# EAGLE board main-board_stm32 (EAGLE 9.6.2)

Size 171.07 x 156.59 mm. Coordinates in mm from the lower left corner, seen from the top.
Outline: 133.18,156.59 128.95,156.59 128.95,149.93 121.08,149.93 121.08,156.59 50.64,156.59 50.64,150.03 42.52,150.03 42.52,156.59 37.88,156.59 arc113 39.33,13.59 42.51,19.04 49.33,15.07 46.33,9.49 arc55 125.13,9.59 124.69,10.3 121.79,15.26 128.61,19.1 131.95,13.69 arc113 133.18,156.59
Copper layers (1*16): Top 0.035mm / dielectric 1.5mm / Bottom 0.035mm
Design rules "default": minimum track width 6mil, minimum drill 0.35mm, track to track 6mil, track to pad 6mil, pad to pad 6mil, via to via 6mil, smd to smd 6mil, copper to edge 40mil, drill to drill 6mil, minimum pad ring 10mil, minimum via ring 8mil, stop-mask expansion 4mil, vias tented up to drill 0mil, thermal gap 10mil
Net classes: 0 default: width 0.3 mm, drill 0.4 mm, clearance 0.2 mm; 4 gnd: width 0.3 mm, drill 0.4 mm, clearance 0.2 mm; 5 VCKT: width 4 mm, drill 4 mm, clearance 0.2 mm
Holes 3.2 mm at 13.66,42.92 65.2,5.12 105.87,5.12 157.41,42.92 29.64,145.78 13.66,125.92 141.42,145.78 157.41,125.92

## Footprints (pad centres in the part's own frame; a part is rotated, then mirrored left to right if it is on the bottom)
CHIPLED_1206 = smd 1.5 x 1.5: A 0,-1.75; C 0,1.75
C1206 = smd 1.6 x 1.8: 1 -1.4,0; 2 1.4,0
TO252 = smd 1 x 1.6: 1 -2.28,-4.8; 2 2.28,-4.8 | smd 5.4 x 6.2: 3 0,2.5
SOT230P700X180-4N = smd 1.75 x 0.9: 1 -3.05,2.3; 2 -3.05,0; 3 -3.05,-2.3 | smd 1.75 x 3.2: 4 3.05,0
SOP65P640X120-16N = smd 1.475 x 0.45: 1 -2.938,2.275; 2 -2.938,1.625; 3 -2.938,0.975; 4 -2.938,0.325; 5 -2.938,-0.325; 6 -2.938,-0.975; 7 -2.938,-1.625; 8 -2.938,-2.275; 9 2.938,-2.275; 10 2.938,-1.625; 11 2.938,-0.975; 12 2.938,-0.325; 13 2.938,0.325; 14 2.938,0.975; 15 2.938,1.625; 16 2.938,2.275
2X5-SHROUDED_LOCK = drill 1.016 pad 1.88: 1 -1.397,5.08; 2 1.397,5.08; 3 -1.397,2.54; 4 1.397,2.54; 5 -1.397,0; 6 1.397,0; 7 -1.397,-2.54; 8 1.397,-2.54; 9 -1.397,-5.08; 10 1.397,-5.08
43045-0613 = drill 1.07 pad 1.62: 1 3,0; 2 0,0; 3 -3,0; 4 3,3; 5 0,3; 6 -3,3; 7 -6,3.94; 8 6,3.94
AMASS_XT60-M = drill 4.5 square: 1 -3.6,0 | drill 4.5: 2 3.6,0
1X03 = drill 1.016 long: 1 -2.54,0; 2 0,0; 3 2.54,0
1X06 = drill 1.016 long: 1 -6.35,0; 2 -3.81,0; 3 -1.27,0; 4 1.27,0; 5 3.81,0; 6 6.35,0
WIRELESS-NRD24L01-PA-EXT = drill 1 square: 1 -18.415,3.81 | drill 1: 2 -15.875,3.81; 3 -18.415,1.27; 4 -15.875,1.27; 5 -18.415,-1.27; 6 -15.875,-1.27; 7 -18.415,-3.81; 8 -15.875,-3.81
KRSSG_MOTOR_DRIVER = drill 1 long: 5V 13.652,5.334; 18V -13.525,13.97; 18V_2 -13.525,11.43; GND -13.525,-6.35; GND_2 -13.525,-8.89; IN17 13.652,-5.334; IN18 13.652,-7.874; M1 13.652,14.478; M1_2 13.652,11.938; M1A -13.525,8.89; M1B -13.525,6.35; M2 13.652,1.27; M2_2 13.652,-1.27; M2A -13.525,3.81; M2B -13.525,1.27; M3 13.652,-11.938; M3_2 13.652,-14.478; M3A -13.525,-1.27; M3B -13.525,-3.81; MACS_OUT 13.652,7.874
M1206 = smd 1.6 x 2: 1 -1.4,0; 2 1.4,0
DTS-6 = drill 1 long: 1 -3.25,2.25; 2 3.25,2.25; 3 -3.25,-2.25; 4 3.25,-2.25
1X08 = drill 1.016 long: 1 -8.89,0; 2 -6.35,0; 3 -3.81,0; 4 -1.27,0; 5 1.27,0; 6 3.81,0; 7 6.35,0; 8 8.89,0
LQFP100-14X14MM = smd 1.194 x 0.305: 1 -7.75,6; 2 -7.75,5.5; 3 -7.75,5; 4 -7.75,4.5; 5 -7.75,4; 6 -7.75,3.5; 7 -7.75,3; 8 -7.75,2.5; 9 -7.75,2; 10 -7.75,1.5; 11 -7.75,1; 12 -7.75,0.5; 13 -7.75,0; 14 -7.75,-0.5; 15 -7.75,-1; 16 -7.75,-1.5; 17 -7.75,-2; 18 -7.75,-2.5; 19 -7.75,-3; 20 -7.75,-3.5; 21 -7.75,-4; 22 -7.75,-4.5; 23 -7.75,-5; 24 -7.75,-5.5; 25 -7.75,-6; 51 7.75,-6; 52 7.75,-5.5; 53 7.75,-5; 54 7.75,-4.5; 55 7.75,-4; 56 7.75,-3.5; 57 7.75,-3; 58 7.75,-2.5; 59 7.75,-2; 60 7.75,-1.5; 61 7.75,-1; 62 7.75,-0.5; 63 7.75,0; 64 7.75,0.5; 65 7.75,1; 66 7.75,1.5; 67 7.75,2; 68 7.75,2.5; 69 7.75,3; 70 7.75,3.5; 71 7.75,4; 72 7.75,4.5; 73 7.75,5; 74 7.75,5.5; 75 7.75,6 | smd 0.305 x 1.194: 26 -6,-7.75; 27 -5.5,-7.75; 28 -5,-7.75; 29 -4.5,-7.75; 30 -4,-7.75; 31 -3.5,-7.75; 32 -3,-7.75; 33 -2.5,-7.75; 34 -2,-7.75; 35 -1.5,-7.75; 36 -1,-7.75; 37 -0.5,-7.75; 38 0,-7.75; 39 0.5,-7.75; 40 1,-7.75; 41 1.5,-7.75; 42 2,-7.75; 43 2.5,-7.75; 44 3,-7.75; 45 3.5,-7.75; 46 4,-7.75; 47 4.5,-7.75; 48 5,-7.75; 49 5.5,-7.75; 50 6,-7.75; 76 6,7.75; 77 5.5,7.75; 78 5,7.75; 79 4.5,7.75; 80 4,7.75; 81 3.5,7.75; 82 3,7.75; 83 2.5,7.75; 84 2,7.75; 85 1.5,7.75; 86 1,7.75; 87 0.5,7.75; 88 0,7.75; 89 -0.5,7.75; 90 -1,7.75; 91 -1.5,7.75; 92 -2,7.75; 93 -2.5,7.75; 94 -3,7.75; 95 -3.5,7.75; 96 -4,7.75; 97 -4.5,7.75; 98 -5,7.75; 99 -5.5,7.75; 100 -6,7.75
5566-4 = drill 1.4 square: 1 2.1,-2.75; 2 -2.1,-2.75; 3 2.1,2.75; 4 -2.1,2.75 | hole 3: 6.8,2.29; -6.8,2.29

## Placement (x,y rotation side)
3V3_LD  [CHIPLED_1206]  -31.31,-150.63 0 top  (outside the outline)
5V_LD  [CHIPLED_1206]  -27.5,-115.07 0 top  (outside the outline)
C1  0.1uF  [C1206]  2.98,-35.06 0 top  (outside the outline)
C2  0.1uF  [C1206]  2.98,-40.14 0 top  (outside the outline)
C3  0.1uF  [C1206]  2.98,-45.22 0 top  (outside the outline)
C4  0.1uF  [C1206]  2.98,-50.3 0 top  (outside the outline)
C5  0.1uF  [C1206]  2.98,-55.38 0 top  (outside the outline)
C6  0.1uF  [C1206]  2.98,-60.46 0 top  (outside the outline)
C7  4.7uF  [C1206]  2.98,-66.81 0 top  (outside the outline)
C8  4.7uF  [C1206]  2.98,-73.16 0 top  (outside the outline)
C9  0.1uF  [C1206]  2.98,-79.51 0 top  (outside the outline)
C10  0.1uF  [C1206]  -7.18,-85.86 0 top  (outside the outline)
C11  0.1uF  [C1206]  -19.88,-98.56 0 top  (outside the outline)
C12  0.1uF  [C1206]  -19.88,-104.91 0 top  (outside the outline)
C13  4.7uF  [C1206]  -31.31,-130.31 0 top  (outside the outline)
C14  4.7uF  [C1206]  -31.31,-136.66 0 top  (outside the outline)
C15  0.1uF  [C1206]  -31.31,-143.01 0 top  (outside the outline)
C16  4.7uF  [C1206]  -80.84,-88.4 0 top  (outside the outline)
IC1  7805DT  [TO252]  -17.34,-88.4 0 top  (outside the outline)
IC2  AP7365-33ERG-13  [SOT230P700X180-4N]  -26.23,-122.69 0 top  (outside the outline)
IC3  AM26LS32ACPWR  [SOP65P640X120-16N]  -75.76,5.58 0 top  (outside the outline)
IC4  AM26LS32ACPWR  [SOP65P640X120-16N]  -75.76,-0.77 0 top  (outside the outline)
J1  [2X5-SHROUDED_LOCK]  -74.49,168.14 0 top  (outside the outline)
J2  43045-0613  [43045-0613]  -71.95,128.77 0 top  (outside the outline)
J3  [2X5-SHROUDED_LOCK]  -74.49,145.28 0 top  (outside the outline)
J4  43045-0613  [43045-0613]  -71.95,79.24 0 top  (outside the outline)
J5  [2X5-SHROUDED_LOCK]  -74.49,95.75 0 top  (outside the outline)
J6  43045-0613  [43045-0613]  -71.95,183.38 0 top  (outside the outline)
J7  43045-0613  [43045-0613]  -71.95,29.71 0 top  (outside the outline)
J8  [2X5-SHROUDED_LOCK]  -74.49,46.22 0 top  (outside the outline)
J10  XT60-M  [AMASS_XT60-M]  -74.49,-56.65 0 top  (outside the outline)
JP1  [1X03]  -30.04,-164.6 0 top  (outside the outline)
JP2  [1X06]  -26.23,-170.95 0 top  (outside the outline)
M1  WIRELESS-NRF24L01-PA-EXT  [WIRELESS-NRD24L01-PA-EXT]  85.53,135.12 90 top
MD1  KRSSG_MOTOR_DRIVER  [KRSSG_MOTOR_DRIVER]  47.43,110.99 90 top
MD2  KRSSG_MOTOR_DRIVER  [KRSSG_MOTOR_DRIVER]  123.63,110.99 90 top
MD3  KRSSG_MOTOR_DRIVER  [KRSSG_MOTOR_DRIVER]  129.98,65.27 0 top
MD4  KRSSG_MOTOR_DRIVER  [KRSSG_MOTOR_DRIVER]  41.08,65.27 180 top
MD5  KRSSG_MOTOR_DRIVER  [KRSSG_MOTOR_DRIVER]  85.53,61.46 270 top
NRF_STATUS  [CHIPLED_1206]  -80.84,-97.29 0 top  (outside the outline)
R1  10K  [M1206]  -7.18,-92.21 0 top  (outside the outline)
R2  1K  [M1206]  -21.15,-115.07 0 top  (outside the outline)
R3  1K  [M1206]  -31.31,-156.98 0 top  (outside the outline)
R4  1K  [M1206]  -80.84,-103.64 0 top  (outside the outline)
S1  DTS-6  [DTS-6]  -5.91,-76.97 0 top  (outside the outline)
SV5  [1X08]  -73.22,-14.74 0 top  (outside the outline)
SV8  [1X08]  -73.22,-29.98 0 top  (outside the outline)
U1  STM32F103VCT6  [LQFP100-14X14MM]  85.53,94.48 0 top
X1  5566-4  [5566-4]  -60.52,149.09 0 top  (outside the outline)
X2  5566-4  [5566-4]  -60.52,98.29 0 top  (outside the outline)
X3  5566-4  [5566-4]  -70.68,196.08 0 top  (outside the outline)
X4  5566-4  [5566-4]  -60.52,48.76 0 top  (outside the outline)

## Library data of the parts
3V3_LD 5V_LD NRF_STATUS = led
C1-C16 = rcl; SPICEPREFIX: C
IC1 = linear
IC2 = SamacSys_Parts; DESCRIPTION: LDO Voltage Regulators LDO 3.3V OUT 600mA 35uA 2 to 6 Vin; HEIGHT: 1.8mm; MANUFACTURER_NAME: Diodes Inc.; MANUFACTURER_PART_NUMBER: AP7365-33ERG-13
IC3 IC4 = SamacSys_Parts; DESCRIPTION: Quadruple Differential Line Receivers; HEIGHT: 1.2mm; MANUFACTURER_NAME: Texas Instruments; MANUFACTURER_PART_NUMBER: AM26LS32ACPWR; MOUSER_PART_NUMBER: 595-AM26LS32ACPWR; MOUSER_PRICE-STOCK: https://www.mouser.co.uk/ProductDetail/Texas-Instruments/AM26LS32ACPWR?qs=Q0GlgB%252BOca9gSFUE%2Fs604w%3D%3D
J1 J3 J5 J8 = SparkFun-Connectors; PROD_ID: CONN-08671; SF_ID: PRT-08506
J2 J4 J6 J7 = 43045-0613; ALLIED_NUMBER: 70090681; ALLIED_PRICE-STOCK: http://www.alliedelec.com/molex-incorporated-43045-0613/70090681/; DESCRIPTION: Header 3.00mm, WTB, dual row, vert,6w Molex MICRO-FIT 3.0 Series, Series Number 43045, 3mm Pitch 6 Way 2 Row Straight PCB Header, Solder Termination, 5A; HEIGHT: mm; MANUFACTURER_NAME: Molex; MANUFACTURER_PART_NUMBER: 43045-0613; MOUSER_PART_NUMBER: 538-43045-0613; MOUSER_PRICE-STOCK: https://www.mouser.com/Search/Refine.aspx?Keyword=538-43045-0613; RS_PART_NUMBER: 6700377P; RS_PRICE-STOCK: http://uk.rs-online.com/web/p/products/6700377P
J10 = XT60-M; AVAILABILITY: In Stock; DESCRIPTION: Plug; DC supply; XT60; male; PIN: 2; for cable; soldered; 30A; 500V; MF: AMASS; MP: XT60-M; PACKAGE: Package; PRICE: None
JP1 JP2 SV5 SV8 = pinhead
M1 = diy_modules_2
MD1-MD5 = KRSSG_MOTOR_DRIVER
R1-R4 = rcl; SPICEPREFIX: R
S1 = switch-tact
U1 = STM32F103VCT6; COPYRIGHT: Copyright (C) 2022 Ultra Librarian. All rights reserved.; MANUFACTURER_PART_NUMBER: STM32F103VCT6; MFR_NAME: STMicroelectronics
X1-X4 = con-molex; MF: MOLEX; OC_FARNELL: unknown; OC_NEWARK: unknown

## Nets
5V_EXT: JP1.3
5V_REG: C13.1 IC2.2 IC2.4 IC3.4 IC3.16 IC4.4 IC4.16 J1.2 J2.5 J3.2 J4.5 J5.2 J6.5 J7.5 J8.2 JP1.2 MD1.5V MD2.5V MD3.5V MD4.5V MD5.5V R2.2 SV8.5
18V: C12.1 IC1.1 MD1.18V MD1.18V_2 MD2.18V MD2.18V_2 MD3.18V MD3.18V_2 MD4.18V MD4.18V_2 MD5.18V MD5.18V_2
CHARGE: SV5.1
DONE: SV5.2
GND: 3V3_LD.C 5V_LD.C C1.2 C2.2 C3.2 C4.2 C5.2 C6.2 C7.2 C8.2 C9.2 C10.2 C11.2 C12.2 C13.2 C14.2 C15.2 C16.2 IC1.3 IC2.1 IC3.8 IC3.12 IC4.8 IC4.12 J1.3 J2.4 J3.3 J4.4 J5.3 J6.4 J7.4 J8.3 JP2.3 M1.1 MD1.GND MD1.GND_2 MD2.GND MD2.GND_2 MD3.GND MD3.GND_2 MD4.GND MD4.GND_2 MD5.GND MD5.GND_2 R1.1 S1.3 S1.4 SV5.8 SV8.4 U1.10 U1.19 U1.20 U1.27 U1.49 U1.74 U1.99
IR1: SV5.7
IR2: SV5.6
IR3: SV5.5
KICK: SV5.4
KICK_CHIP: SV5.3
M1ACS_OUT: MD1.MACS_OUT
M1EA: IC3.1 J1.6
M1EA_RECT: IC3.3
M1EAN: IC3.2 J1.5
M1EB: IC3.6 J1.8
M1EB_RECT: IC3.5
M1EBN: IC3.7 J1.7
M1H1: J6.1
M1H2: J6.2
M1H3: J6.3
M2ACS_OUT: MD2.MACS_OUT
M2EA: J3.6
M2EA_RECT: IC3.13
M2EAN: J3.5
M2EB: IC3.10 J3.8
M2EB_RECT: IC3.11
M2EBN: IC3.9 J3.7
M2H1: J2.1
M2H2: J2.2
M2H3: J2.3
M3ACS_OUT: MD3.MACS_OUT
M3EA: IC3.14 IC4.1 J5.6
M3EA_RECT: IC4.3
M3EAN: IC3.15 IC4.2 J5.5
M3EB: IC4.6 J5.8
M3EB_RECT: IC4.5
M3EBN: IC4.7 J5.7
M3H1: J4.1
M3H2: J4.2
M3H3: J4.3
M4ACS_OUT: MD4.MACS_OUT
M4EA: IC4.14 J8.6
M4EA_RECT: IC4.13
M4EAN: IC4.15 J8.5
M4EB: IC4.10 J8.8
M4EB_RECT: IC4.11
M4EBN: IC4.9 J8.7
M4H1: J7.1
M4H2: J7.2
M4H3: J7.3
M11: MD1.M1 MD1.M1_2 X3.1
M11A: MD1.M1A
M11B: MD1.M1B
M12: MD1.M2 MD1.M2_2 X3.2
M12A: MD1.M2A
M12B: MD1.M2B
M13: MD1.M3 MD1.M3_2 X3.3
M13A: MD1.M3A
M13B: MD1.M3B
M21: MD2.M1 MD2.M1_2 X1.1
M21A: MD2.M1A
M21B: MD2.M1B
M22: MD2.M2 MD2.M2_2 X1.2
M22A: MD2.M2A
M22B: MD2.M2B
M23: MD2.M3 MD2.M3_2 X1.3
M23A: MD2.M3A
M23B: MD2.M3B
M31: MD3.M1 MD3.M1_2 X2.1
M31A: MD3.M1A
M31B: MD3.M1B
M32: MD3.M2 MD3.M2_2 X2.2
M32A: MD3.M2A
M32B: MD3.M2B
M33: MD3.M3 MD3.M3_2 X2.3
M33A: MD3.M3A
M33B: MD3.M3B
M41: MD4.M1 MD4.M1_2 X4.1
M41A: MD4.M1A
M41B: MD4.M1B
M42: MD4.M2 MD4.M2_2 X4.2
M42A: MD4.M2A
M42B: MD4.M2B
M43: MD4.M3 MD4.M3_2 X4.3
M43A: MD4.M3A
M43B: MD4.M3B
MD1: MD5.M1 MD5.M1_2 SV8.8
MD1A: MD5.M1A
MD1B: MD5.M1B
MD2: MD5.M2 MD5.M2_2 SV8.7
MD2A: MD5.M2A
MD2B: MD5.M2B
MD3: MD5.M3 MD5.M3_2 SV8.6
MD3A: MD5.M3A
MD3B: MD5.M3B
MDACS_OUT: MD5.MACS_OUT
MDH1: SV8.3
MDH2: SV8.2
MDH3: SV8.1
N$1: R1.2 U1.94
N$2: 3V3_LD.A R3.1
N$3: C11.1 IC1.2 JP1.1
N$4: 5V_LD.A R2.1
N$7: NRF_STATUS.A R4.1
NRF_CE: M1.3
NRF_CSN: M1.4 NRF_STATUS.C
NRF_IRQ: M1.8
NRF_MISO: M1.7
NRF_MOSI: M1.6
NRF_SCK: M1.5
NRST: C10.1 JP2.5 S1.1 S1.2
SWCLK: JP2.2 U1.76
SWDIO: JP2.4 U1.72
SWO: JP2.6 U1.89
VCC: C1.1 C2.1 C3.1 C4.1 C5.1 C6.1 C7.1 C8.1 C9.1 C14.1 C15.1 C16.1 IC2.3 JP2.1 M1.2 R3.2 R4.2 U1.6 U1.11 U1.21 U1.22 U1.28 U1.50 U1.75 U1.100

## Tracks (layer width: path | path; a pad name or v marks a point on that pad's centre or on a via)
5V_REG  (22 unrouted)
18V  (11 unrouted)
GND  (55 unrouted)
M1EA  (1 unrouted)
M1EAN  (1 unrouted)
M1EB  (1 unrouted)
M1EBN  (1 unrouted)
M2EB  (1 unrouted)
M2EBN  (1 unrouted)
M3EA  (2 unrouted)
M3EAN  (2 unrouted)
M3EB  (1 unrouted)
M3EBN  (1 unrouted)
M4EA  (1 unrouted)
M4EAN  (1 unrouted)
M4EB  (1 unrouted)
M4EBN  (1 unrouted)
M11  (2 unrouted)
M12  (2 unrouted)
M13  (2 unrouted)
M21  (2 unrouted)
M22  (2 unrouted)
M23  (2 unrouted)
M31  (2 unrouted)
M32  (2 unrouted)
M33  (2 unrouted)
M41  (2 unrouted)
M42  (2 unrouted)
M43  (2 unrouted)
MD1  (2 unrouted)
MD2  (2 unrouted)
MD3  (2 unrouted)
N$1  (1 unrouted)
N$2  (1 unrouted)
N$3  (2 unrouted)
N$4  (1 unrouted)
N$7  (1 unrouted)
NRF_CSN  (1 unrouted)
NRST  (3 unrouted)
SWCLK  (1 unrouted)
SWDIO  (1 unrouted)
SWO  (1 unrouted)
VCC  (24 unrouted)